# Altium PCB StaticModulo_v1i2.PcbDoc
Units mm, origin at the board's own origin, x right, y up, seen from the top; angles counter-clockwise.
Board outline 30 x 45 mm, 4 copper layers (Component Side, Ground Plane, Power Plane, Solder Side), stack 0.844 mm thick; 12 components, 20 nets, 62 pads, 10 vias.
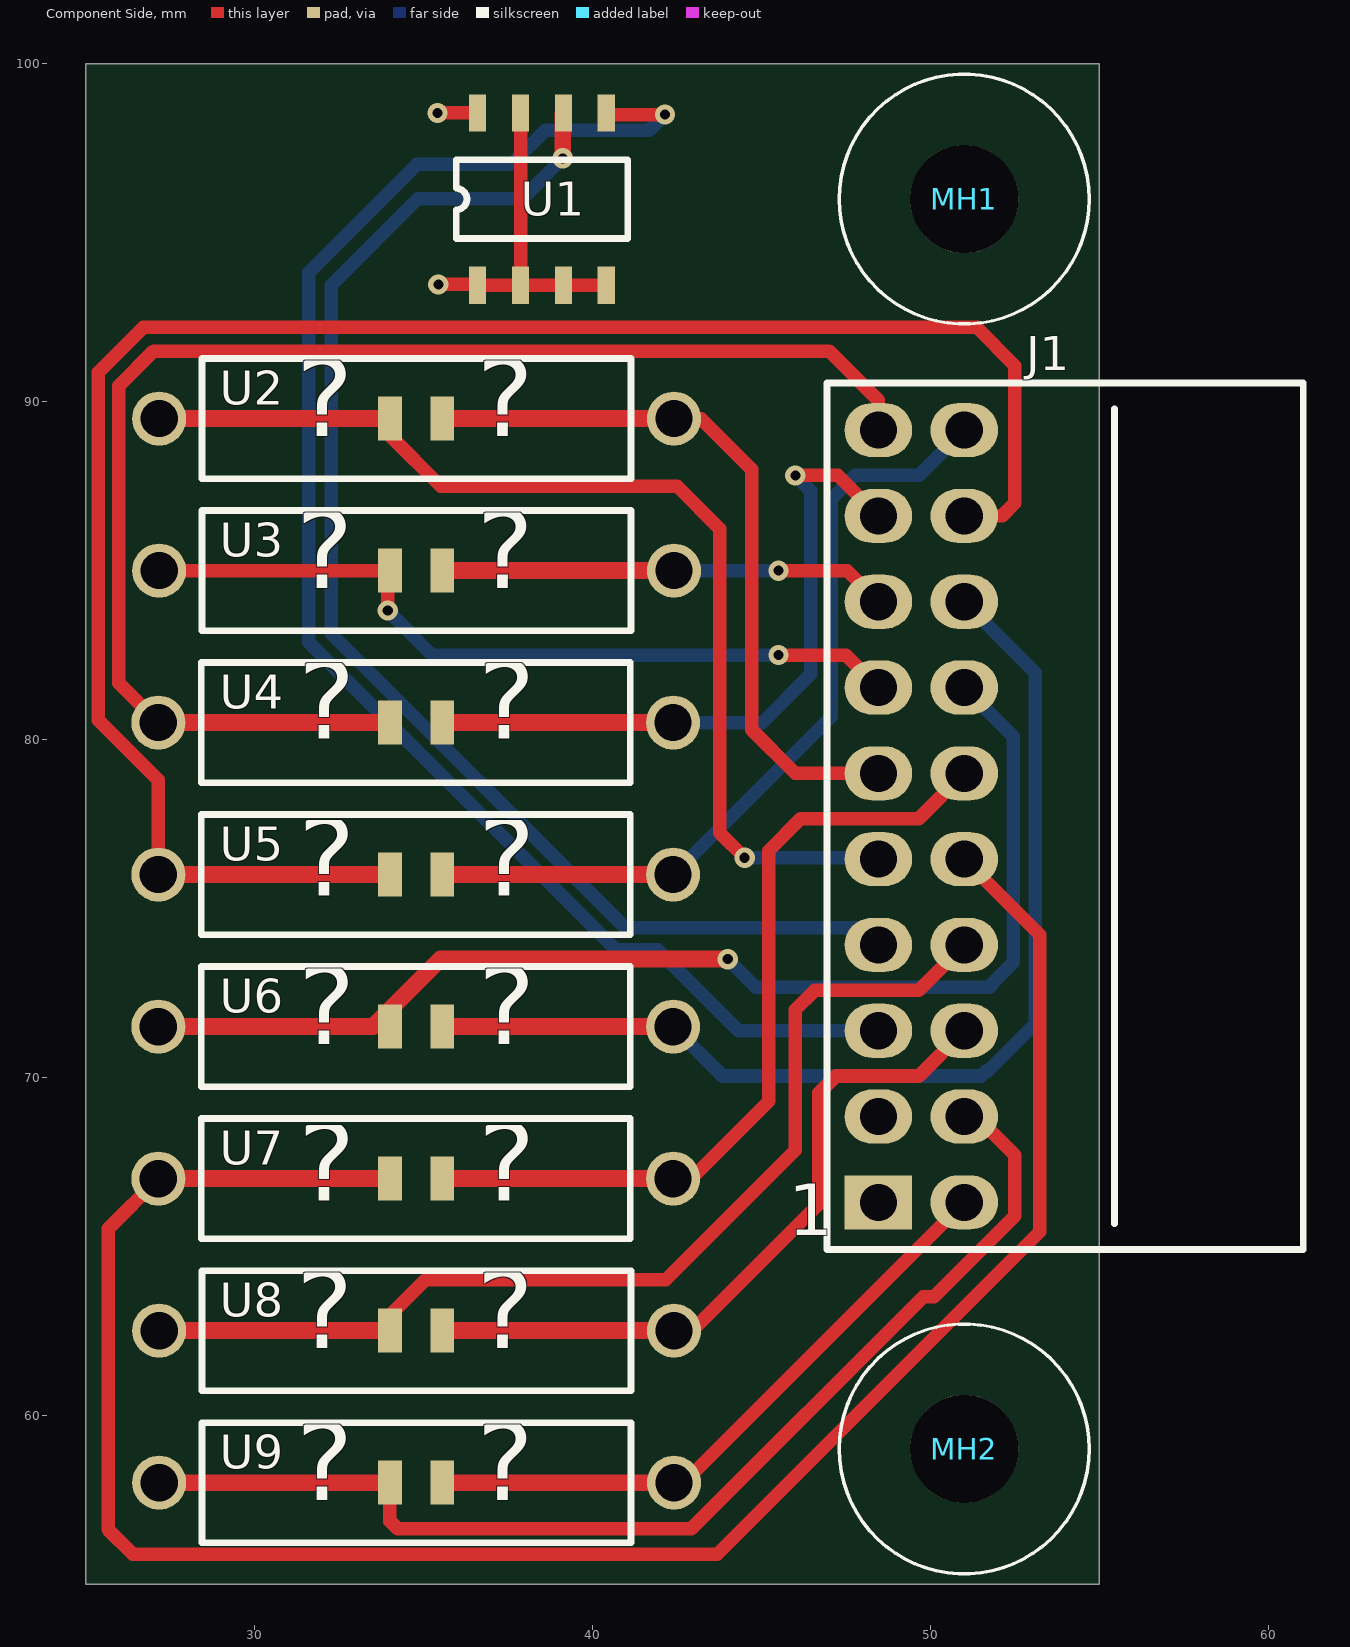
[diagram p0: Component Side view]
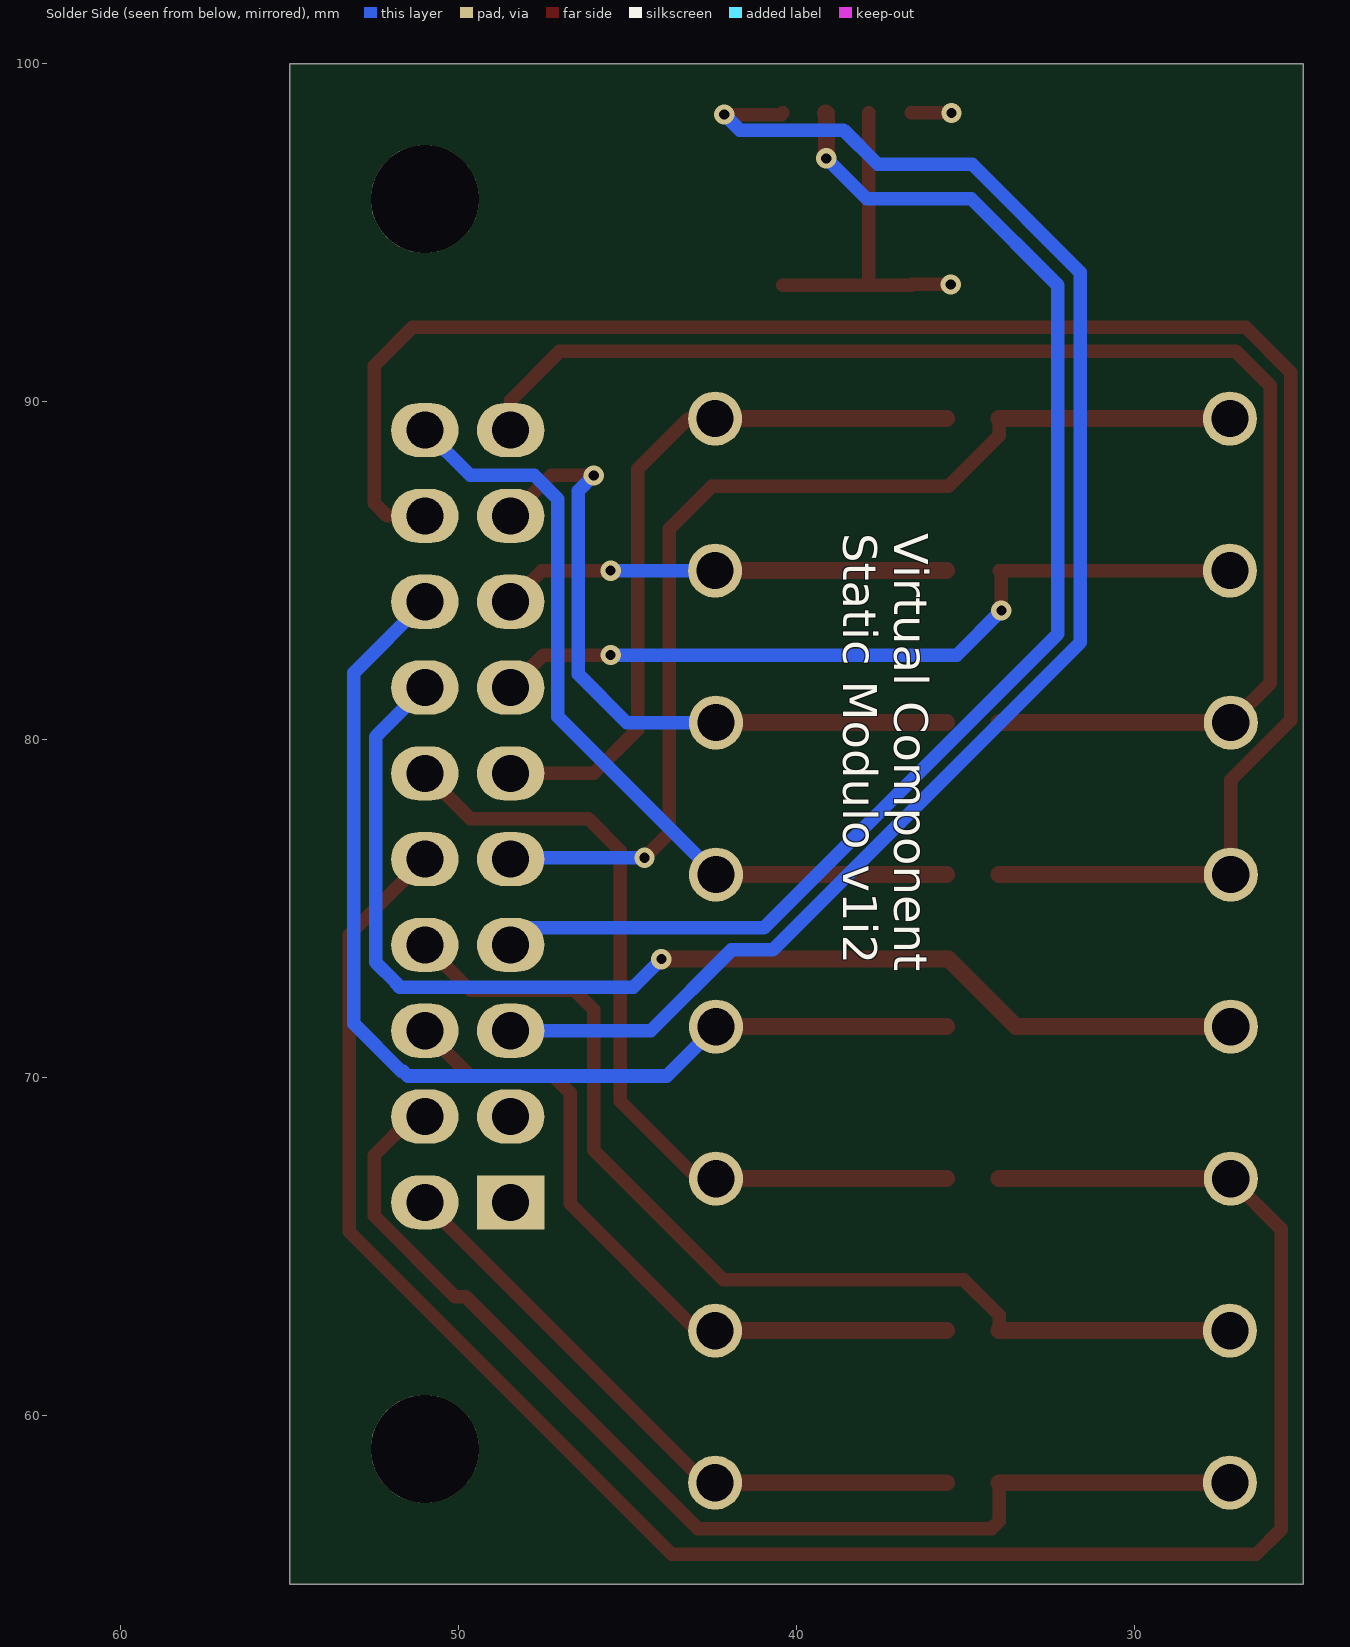
[diagram p1: Solder Side view, seen from below]
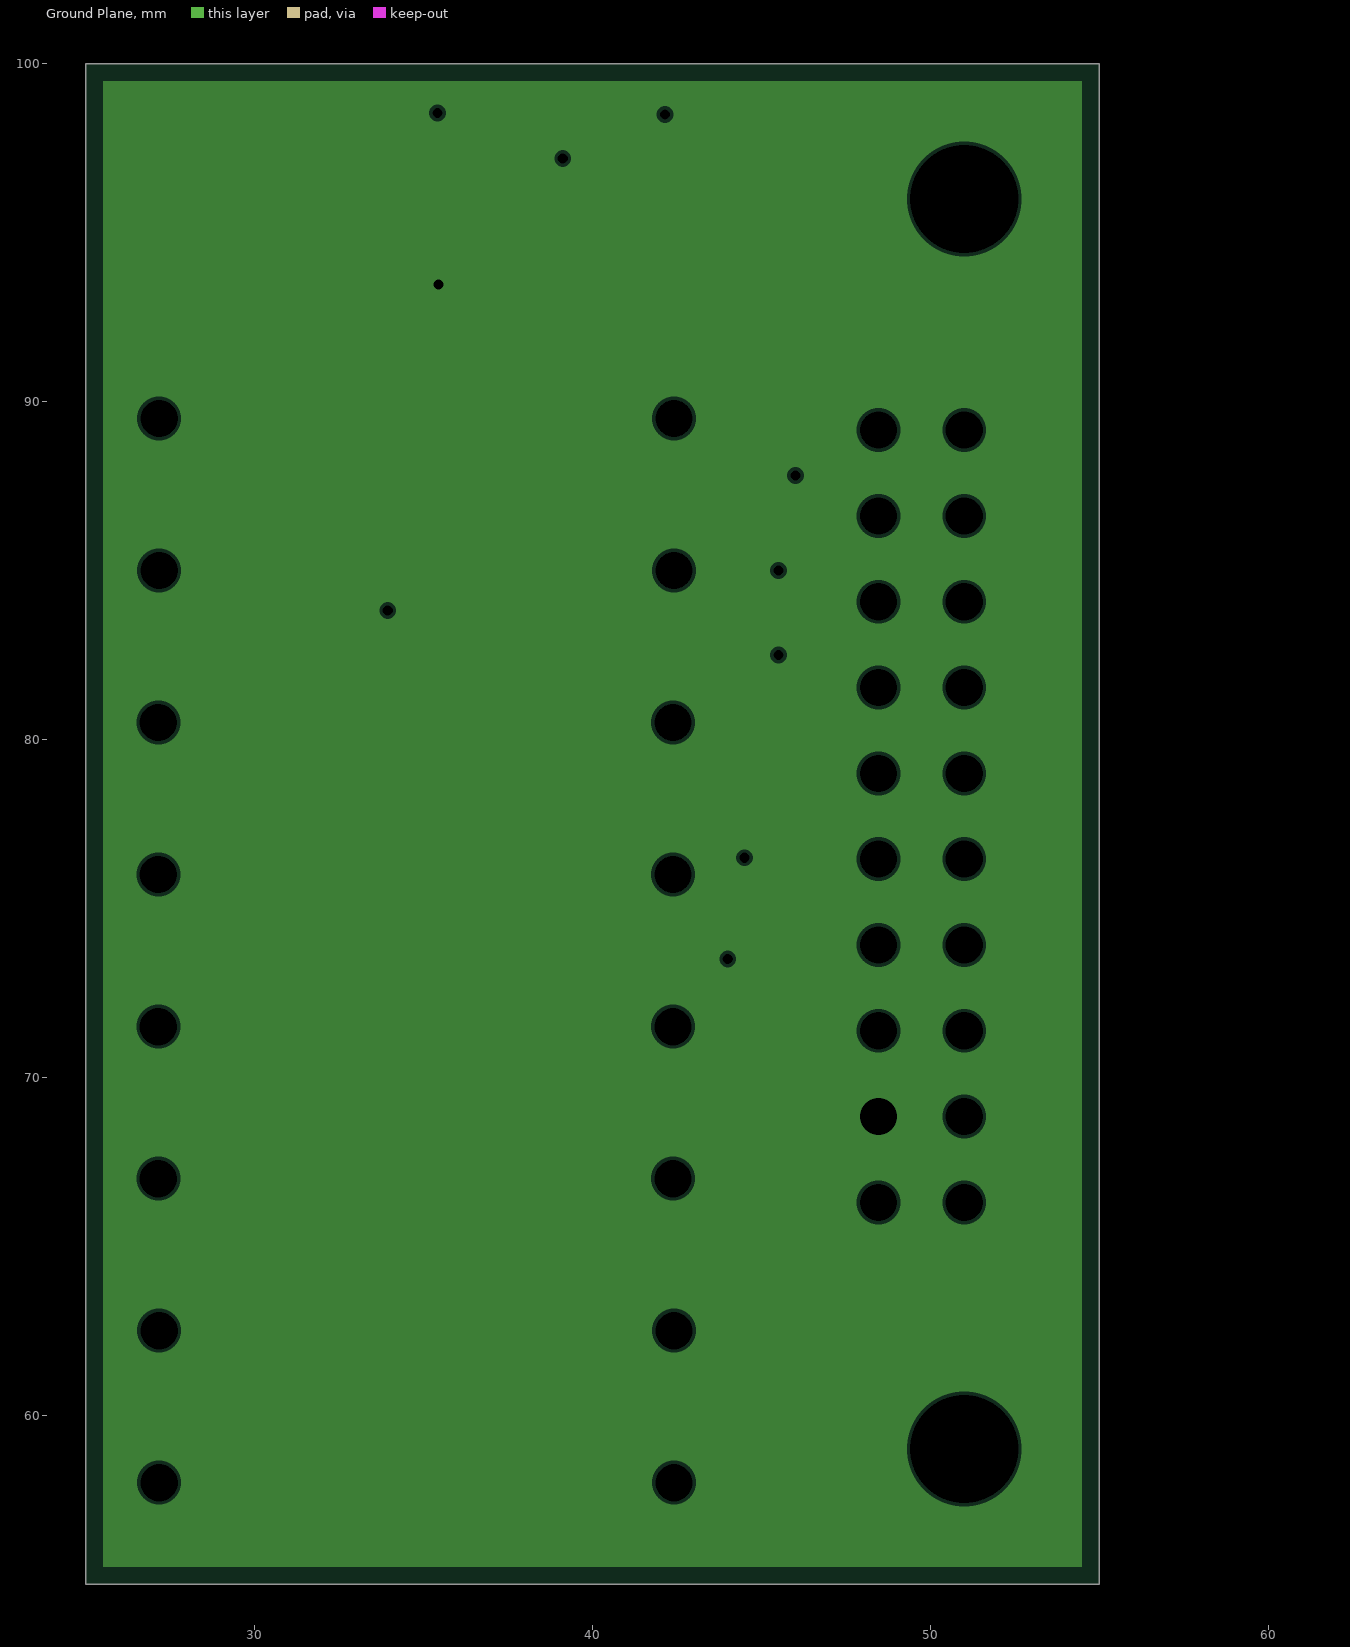
[diagram p2: Ground Plane, clearances drawn from the general rule]
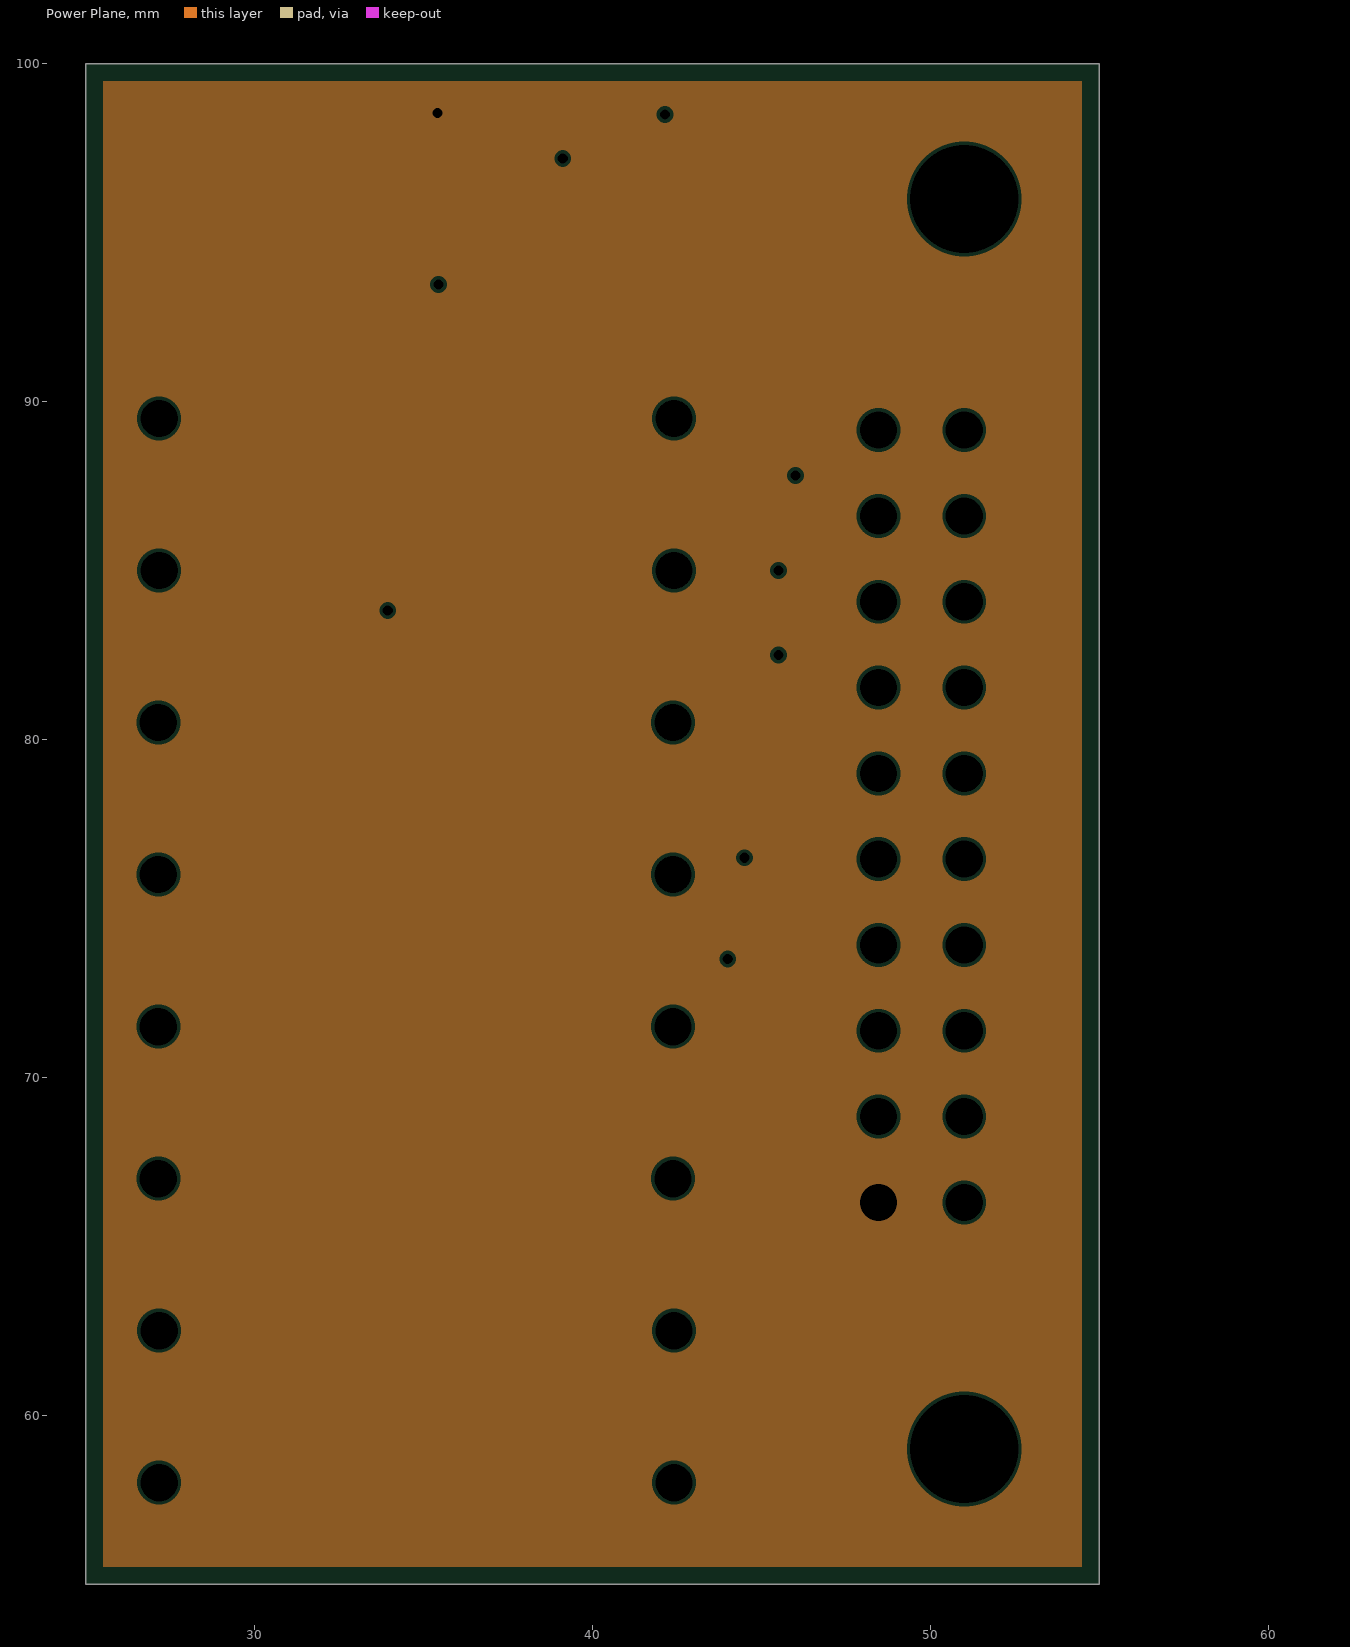
[diagram p3: Power Plane, clearances drawn from the general rule]

## Layer stack, top to bottom
Top Solder: solder mask 0.0102, Solder Resist, Dk 3.5
Component Side: signal copper 0.0356
Dielectric 1: core 0.32, FR-4, Dk 4.8
Ground Plane: plane copper 0.036, net GND
Dielectric 3: prepreg 0.127, Dk 4.2
Power Plane: plane copper 0.036, net +5
Dielectric 4: core 0.254, Dk 4.2
Solder Side: signal copper 0.0356
Bottom Solder: solder mask 0.0102, Solder Resist, Dk 3.5

## Board outline
25,55 25,100 55,100 55,55

## Design rules (kind name [scope] priority, off if disabled: settings)
Clearance "Around polygon" [IsRegion] p1: gap=0.3 ignorepadtopadclearanceinfootprint=FALSE
Clearance [All] p2: gap=0.2 ignorepadtopadclearanceinfootprint=FALSE
ComponentClearance [All] p1: gap=0.2 collisioncheckmode=3 verticalgap=0.2 showdistances=FALSE
HoleSize [All] p1: absolutevalues=TRUE maxlimit=3.5 minlimit=0.2 maxpercent=80.000 minpercent=20.000
HoleToHoleClearance [All] p1: gap=0.305 allowstackedmicrovias=TRUE
MinimumSolderMaskSliver [All] p1: minsoldermaskwidth=0.33
PlaneClearance [All] p1: clearance=0.1
PlaneConnect [All] p1: planeconnectstyle=Direct reliefexpansion=0.508 reliefentries=4 reliefconductorwidth=0.254 reliefairgap=0.254
PolygonConnect [All] p1: connectstyle=Direct reliefconductorwidth=0.254 reliefentries=4 polygonreliefangle="90 Angle" airgapwidth=0.254
RoutingVias [All] p1: holewidth=0.3 width=0.6 viastyle="Through Hole" minholewidth=0.3 minwidth=0.6 maxholewidth=0.3 maxwidth=0.6
SilkToSilkClearance [All] p1: silktosilkclearance=0.1
SilkToSolderMaskClearance [IsPad] p1: minsilkscreentomaskgap=0.1 clearancetoexposedcopper=TRUE
SolderMaskExpansion [All] p1: expansion=0.1
Width Width_POWER [InNet ('+*') or InNet('GND')] p1: maxlimit=3 minlimit=0.4 preferedwidth=0.4
Width [All] p2: maxlimit=0.5 minlimit=0.3 preferedwidth=0.4
22 further rules are at their usual default settings.

## Components (designator, comment, footprint, x,y, rotation, side; value= is the part's Value field where it differs from the comment)
J1 "PRPC010DBAN-M71RC" HDR_MALE_10x2x2.54 51,66.3 r180 top
MH1 "MH 3.2mm NP" MH3.2mm 51,96 r0 top
MH2 "MH 3.2mm NP" MH3.2mm 51,59 r0 top
U1 "AT24C256C-SSHL-B" AT24C256C-SSHL-B 38.5,96 r90 top
U2 "VirtualComponentStatic" VIRTUAL_COMPONENT_STATIC 27.168,89.5 r0 top
U3 "VirtualComponentStatic" VIRTUAL_COMPONENT_STATIC 27.168,85 r0 top
U4 "VirtualComponentStatic" VIRTUAL_COMPONENT_STATIC 42.382,80.5 r180 top
U5 "VirtualComponentStatic" VIRTUAL_COMPONENT_STATIC 42.382,76 r180 top
U6 "VirtualComponentStatic" VIRTUAL_COMPONENT_STATIC 42.382,71.5 r180 top
U7 "VirtualComponentStatic" VIRTUAL_COMPONENT_STATIC 42.382,67 r180 top
U8 "VirtualComponentStatic" VIRTUAL_COMPONENT_STATIC 27.168,62.5 r0 top
U9 "VirtualComponentStatic" VIRTUAL_COMPONENT_STATIC 27.168,58 r0 top

## Footprints (in the part's own frame and the unit in brackets; to place one, negate y for a bottom-side part, rotate by r counter-clockwise, add the part's x,y. Pads: shape width x height; smd on the part's side, far side on the other; paste and mask are expansions set on the pad)
AT24C256C-SSHL-B [mm]
  rect 1.1x0.51 smd mask+0.02: 1(-2.55,1.905) 2(-2.55,0.635) 3(-2.55,-0.635) 4(-2.55,-1.905) 5(2.55,-1.905) 6(2.55,-0.635) 7(2.55,0.635) 8(2.55,1.905)
  silkscreen extent -1.17,-2.54 1.17,2.54, body extent -2.95,-2.44 3.05,2.46, height 1.75
HDR_MALE_10x2x2.54 [mm] "PRPC010DBAN-M71RC"
  rect 2x1.6 hole 1.1: 1(2.54,0)
  oval 2x1.6 hole 1.1: 2(2.54,-2.54) 4(2.54,-7.62) 5(2.54,-10.16) 6(2.54,-12.7) 7(2.54,-15.24) 8(2.54,-17.78) 9(2.54,-20.32) 10(2.54,-22.86) 11(0,-22.86) 12(0,-20.32) 13(0,-17.78) 14(0,-15.24) 15(0,-12.7) 16(0,-10.16) 17(0,-7.62) 19(0,-2.54) 20(0,0)
  oval 2x1.6 hole 1.1 mask+0.102: 3(2.54,-5.08) 18(0,-5.08)
  silkscreen extent -10.03,-24.26 4.06,1.4, body extent -9.93,-24.1 2.79,1.3, height 5.45
MH3.2mm [mm] "MHNP 3.2mm"
  round 3.2 hole 3.2 unplated: 1(0,0)
  silkscreen extent -3.7,-3.7 3.7,3.7
VIRTUAL_COMPONENT_STATIC [mm]
  round 1.6 hole 1.1: 1(0,0) 2(15.24,0)
  rect 0.7x1.3 smd: 1(6.832,0) 2(8.382,0)
  silkscreen extent 1.27,-1.78 13.97,1.78

## Part data
J1: library part "HDR Male 2x10_2.54", "20 Positions Header, Unshrouded, Breakaway Connector 0.100\" (2.54mm) Through Hole, Right Angle Gold", Colour=Black, Manufacturer=Sullins, Package Quantity=1, Supplier Part Number 1=S2111EC-10-ND, ComponentLink1Description=https://datasheet.ciiva.com/741/xrxczzzdxxn-m71rc-11639-b-741675.pdf, ComponentLink1URL=https://datasheet.ciiva.com/741/xrxczzzdxxn-m71rc-11639-b-741675.pdf, Connector Type="Male Pin", Contact Mating Length=0.23inch, Contact Plating=Gold, Manufacturer Part Number=PRPC010DBAN-M71RC, Mount="Through Hole", Number of Positions=20, Number of Rows=2, Packaging=Bulk, Pitch=0.1inch, Pricing 1="1=1.08, 10=0.97, 100=0.7989, 500=0.6315, 1000=0.5421, 5000=0.49455, 10000=0.47553 (USD)", Row Spacing=0.1inch, Stock 1=459, Supplier 1=Digi-Key, System=Connector, Termination=Solder
MH1 MH2: library part MHNP, "Mounting hole 3.2mm non plated"
U1: "ATMEL         AT24C256C-SSHL-B            EEPROM, 256 Kbit, 32K x 8bit, 1 MHz, Serial, SOIC, 8 Pins", Case/Package=SOIC, Frequency=1MHz, Manufacturer="Microchip / Atmel", Max Operating Temperature=85°C, Max Supply Voltage=5.5V, Min Operating Temperature=-40°C, Min Supply Voltage=1.7V, Nominal Supply Current=3mA, Package Quantity=100, Supplier Part Number 1=AT24C256C-SSHL-B-ND, Voltage=5V, Access Time=550ns, ComponentLink1Description=https://datasheet.ciiva.com/15123/getdatasheetpartid-367456-15123424.pdf, ComponentLink1URL=https://datasheet.ciiva.com/15123/getdatasheetpartid-367456-15123424.pdf, ComponentLink2Description=https://datasheet.ciiva.com/15123/getdatasheetpartid-304516-15123348.pdf, ComponentLink2URL=https://datasheet.ciiva.com/15123/getdatasheetpartid-304516-15123348.pdf, ComponentLink3Description=https://datasheet.ciiva.com/1910/atmel-8568-seeprom-at24c256c-datasheet-1910422.pdf, ComponentLink3URL=https://datasheet.ciiva.com/1910/atmel-8568-seeprom-at24c256c-datasheet-1910422.pdf, ComponentLink4Description=https://datasheet.ciiva.com/1509/1726561-1509879.pdf, ComponentLink4URL=https://datasheet.ciiva.com/1509/1726561-1509879.pdf, Contact Plating=Tin,Matte, Density=256Kb, Height=1.5mm, Interface=I2C,Serial,2-Wire, Length=5.05mm, Manufacturer Part Number=AT24C256C-SSHL-B, Max Frequency=1MHz, Memory Size=256Kb, Memory Type=EEPROM, Mount="Surface Mount", Number of Pins=8, Number of Words=32768, Packaging=Bulk, Pricing 1="1=0.68, 10=0.619, 25=0.6108, 100=0.543 (USD)", Radiation Hardening=No, REACH SVHC="No SVHC", Stock 1=4655, Supplier 1=Digi-Key, Width=3.99mm

## Via types
v1: diameter 0.6, hole 0.3, Component Side to Solder Side, tented both sides, 8 vias
v2: diameter 0.6/0.6 (per signal layer), hole 0.3, Component Side to Solder Side, tented both sides, 2 vias

## Nets (pads, with @x,y where several pads share a name; then routed paths per layer and width w, separated by ;. In a path a pad name is that pad's centre, name@x,y a point inside that pad or via, vN(x,y) a via of type N, cw(c..) or ccw(c..) an arc to the next point about the centre after c; other vN are vias at no path point)
+5: J1.1 U1.8 | length 1.2
  Component Side w0.4: v2(35.408,98.55) U1.8
GND: J1.2 U1.1 U1.2 U1.3 U1.4 U1.7 | length 10.1
  Component Side w0.4: v2(35.433,93.472) 36.573,93.472 U1.1 U1.2 ; U1.7 U1.2 ; U1.4 U1.3 U1.2
SCL: J1.4 U1.6 | length 40.1
  Component Side w0.5: v1(39.116,97.206) 39.116,98.531 U1.6
  Solder Side w0.4: v1(39.116,97.206) 37.922,96.012 34.826,96.012 32.258,93.444 32.258,83.134 40.97,74.422 47.958,74.422 J1.4
SDA: J1.3 U1.5 | length 46.8
  Component Side w0.4: U1.5 40.454,98.501 v1(42.139,98.501)
  Solder Side w0.4: v1(42.139,98.501) 41.681,98.044 38.608,98.044 37.592,97.028 34.798,97.028 31.598,93.828 31.598,82.875 40.701,73.772 41.925,73.772 44.317,71.38 J1.3
X0: J1.5 U2.1 | length 32.3
  Component Side w0.4: U2.1@34,89.5 34,89 35.5,87.5 42.5,87.5 43.764,86.236 43.764,77.236 v1(44.5,76.5)
  Component Side w0.5: U2.1@27.168,89.5 U2.1@34,89.5
  Solder Side w0.4: v1(44.5,76.5) 48.42,76.5 J1.5
X1: J1.6 U2.2 | length 21.8
  Component Side w0.4: U2.2@42.408,89.5 43.209,89.5 44.704,88.005 44.704,80.296 46,79 J1.6
  Component Side w0.5: U2.2@35.55,89.5 U2.2@42.408,89.5
X2: J1.7 U3.1 | length 23.5
  Component Side w0.4: U3.1@27.168,85 33.869,85 U3.1@33.934,84.934 ; v1(33.934,83.82) U3.1@33.934,84.934 ; U3.1@34,85 U3.1@33.934,84.934 ; v1(45.5,82.5) 47.5,82.5 J1.7
  Solder Side w0.4: v1(33.934,83.82) 35.255,82.5 v1(45.5,82.5)
X3: J1.8 U3.2 | length 13.3
  Component Side w0.4: v1(45.5,85) 47.54,85 J1.8
  Component Side w0.5: U3.2@35.55,85 U3.2@42.408,85
  Solder Side w0.4: U3.2@42.408,85 v1(45.5,85)
X4: J1.9 U4.1 | length 20.5
  Component Side w0.4: v1(46,87.82) 47.26,87.82 J1.9
  Component Side w0.5: U4.1@35.55,80.5 U4.1@42.382,80.5
  Solder Side w0.4: U4.1@42.382,80.5 45.02,80.5 46.46,81.94 46.46,87.36 v1(46,87.82)
X5: J1.10 U4.2 | length 41.7
  Component Side w0.4: U4.2@27.142,80.5 25.968,81.674 25.968,90.468 27,91.5 47,91.5 48.46,90.04 J1.10
  Component Side w0.5: U4.2@27.142,80.5 U4.2@34,80.5
X6: J1.11 U5.1 | length 24.7
  Component Side w0.5: U5.1@35.55,76 U5.1@42.382,76
  Solder Side w0.4: U5.1@42.382,76 47.06,80.678 47.06,87.117 47.763,87.82 49.66,87.82 J1.11
X7: J1.12 U5.2 | length 56.3
  Component Side w0.4: U5.2@27.142,76 27.142,78.803 25.368,80.577 25.368,90.868 26.702,92.202 51.368,92.202 52.5,91.07 52.5,87 52.12,86.62 J1.12
  Component Side w0.5: U5.2@27.142,76 U5.2@34,76
X8: J1.13 U6.1 | length 32.2
  Component Side w0.5: U6.1@35.55,71.5 U6.1@42.382,71.5
  Solder Side w0.4: U6.1@42.382,71.5 43.842,70.04 51.5,70.04 51.64,70.18 51.697,70.18 53.1,71.583 53.1,81.98 J1.13
X9: J1.14 U6.2 | length 35.5
  Component Side w0.5: U6.2@27.142,71.5 33.5,71.5 35.5,73.5 v1(44,73.5)
  Solder Side w0.4: v1(44,73.5) 44.83,72.67 51.75,72.67 51.85,72.77 51.85,72.802 52.45,73.402 52.45,80.09 J1.14
X10: J1.15 U7.1 | length 24.8
  Component Side w0.4: U7.1@42.382,67 42.92,67 45.212,69.292 45.212,76.712 46.16,77.66 49.66,77.66 J1.15
  Component Side w0.5: U7.1@35.55,67 U7.1@42.382,67
X11: J1.16 U7.2 | length 61.7
  Component Side w0.4: U7.2@27.142,67 25.654,65.512 25.654,56.617 26.391,55.88 43.688,55.88 53.238,65.43 53.238,74.222 J1.16
  Component Side w0.5: U7.2@27.142,67 U7.2@34,67
X12: J1.17 U8.1 | length 31.3
  Component Side w0.4: U8.1@34,62.5 34,62.956 35.052,64.008 42.164,64.008 46,67.844 46,72 46.58,72.58 49.66,72.58 J1.17
  Component Side w0.5: U8.1@27.168,62.5 U8.1@34,62.5
X13: J1.18 U8.2 | length 21
  Component Side w0.4: U8.2@42.408,62.5 42.942,62.5 46.7,66.258 46.7,69.538 47.202,70.04 49.66,70.04 J1.18
  Component Side w0.5: U8.2@35.55,62.5 U8.2@42.408,62.5
X14: J1.19 U9.1 | length 34.2
  Component Side w0.4: U9.1@34,58 34,56.865 34.223,56.642 42.926,56.642 49.784,63.5 50.097,63.5 52.502,65.905 52.502,67.69 51.352,68.84 J1.19
  Component Side w0.5: U9.1@27.168,58 U9.1@34,58
X15: J1.20 U9.2 | length 18.9
  Component Side w0.4: U9.2@42.408,58 42.7,58 J1.20
  Component Side w0.5: U9.2@35.55,58 U9.2@42.408,58
pads on no net: MH1.1 MH2.1

## Polygon pours and split planes (outlines as drawn)
+5 on Power Plane (split plane): 54.49,55.51 25.51,55.51 25.51,99.49 54.49,99.49
GND on Ground Plane (split plane): 54.49,55.51 25.51,55.51 25.51,99.49 54.49,99.49

## Silkscreen, mask and mechanical layers (free items; w line width, h text height)
Bottom Overlay:
  text "Virtual Component / Static Modulo v1i2" at 38.608,86.106 h1 r90
BoardCutout:
  the board outline again, w0.1

## Text inside footprints (layer, text, board x,y; h text height)
J1: Top Overlay "1" at 45.796,65.329 h1.52
U2: Top Overlay "?" at 31.232,88.23 h4; Top Overlay "?" at 36.566,88.23 h4; Mechanical 29 "Virtual Component" at 26.787,88.992 h1.02
U3: Top Overlay "?" at 36.566,83.73 h4; Top Overlay "?" at 31.232,83.73 h4; Mechanical 29 "Virtual Component" at 26.787,84.492 h1.02
U4: Top Overlay "?" at 31.278,79.266 h4; Top Overlay "?" at 36.612,79.266 h4; Mechanical 29 "Virtual Component" at 42.763,81.008 h1.02 r180
U5: Top Overlay "?" at 36.612,74.622 h4; Top Overlay "?" at 31.278,74.622 h4; Mechanical 29 "Virtual Component" at 42.763,76.508 h1.02 r180
U6: Top Overlay "?" at 31.278,70.232 h4; Top Overlay "?" at 36.612,70.232 h4; Mechanical 29 "Virtual Component" at 42.763,72.008 h1.02 r180
U7: Top Overlay "?" at 36.612,65.588 h4; Top Overlay "?" at 31.278,65.588 h4; Mechanical 29 "Virtual Component" at 42.763,67.508 h1.02 r180
U8: Top Overlay "?" at 31.232,61.23 h4; Top Overlay "?" at 36.566,61.23 h4; Mechanical 29 "Virtual Component" at 26.787,61.992 h1.02
U9: Top Overlay "?" at 36.566,56.73 h4; Top Overlay "?" at 31.232,56.73 h4; Mechanical 29 "Virtual Component" at 26.787,57.492 h1.02